# EAGLE board Copy of KeyVelocitysch (EAGLE 4.13), part 1 of 2
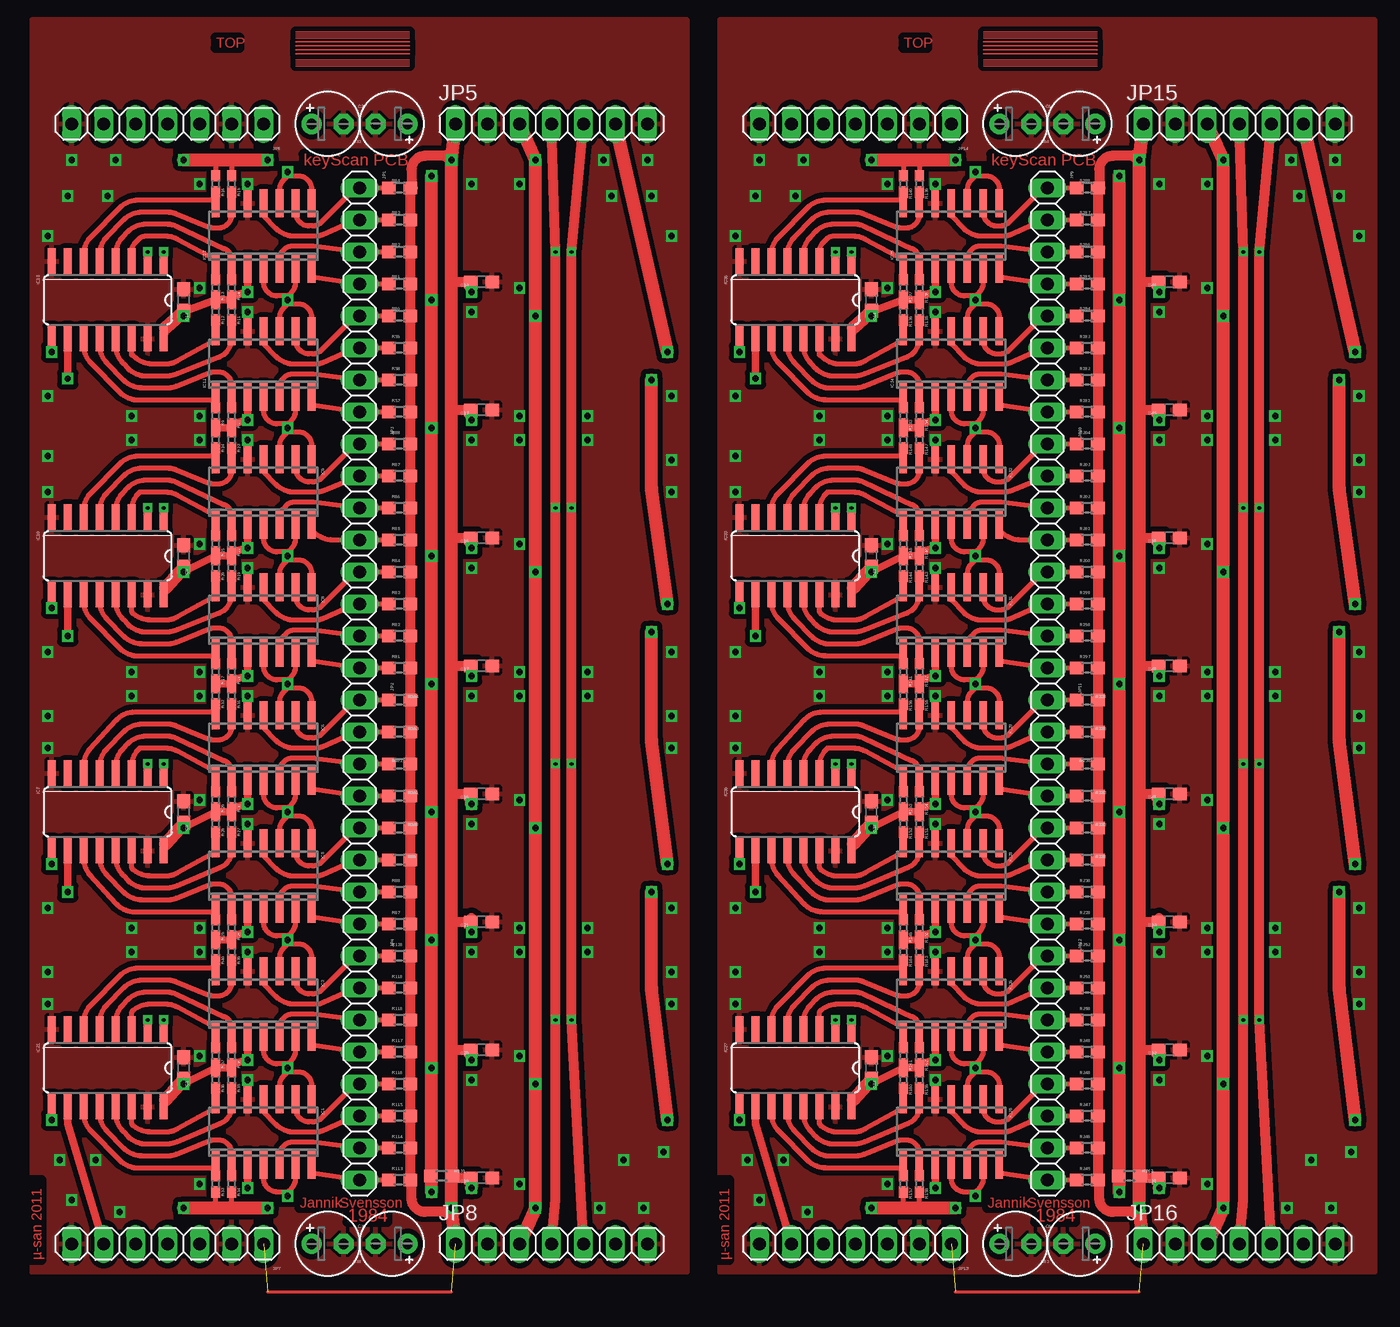
[diagram p0: board, top side]
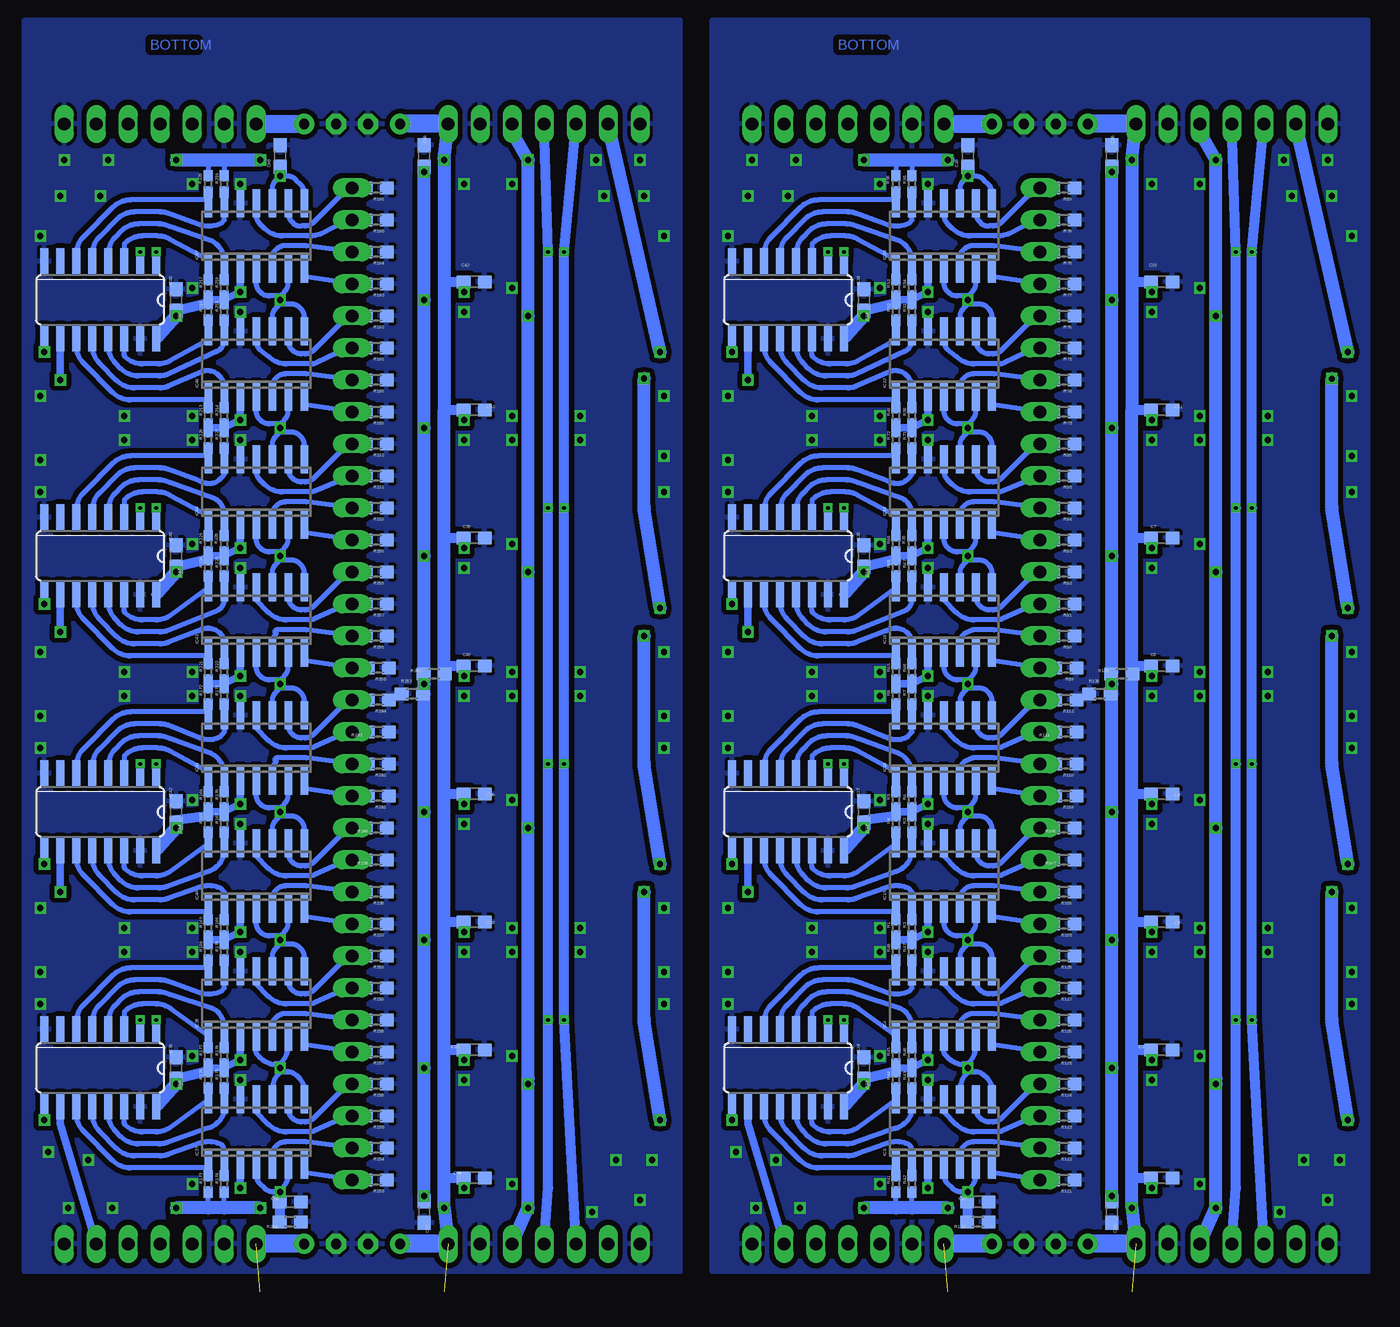
[diagram p1: board, bottom side, seen from below]

No outline drawn. Coordinates in mm, seen from the top.
Copper layers (1*16): Top 0.035mm / dielectric 1.5mm / Bottom 0.035mm
Design rules "default": minimum track width 10mil, minimum drill 24mil, track to track 8mil, track to pad 8mil, pad to pad 8mil, via to via 8mil, smd to smd 8mil, copper to edge 40mil, drill to drill 8mil, minimum pad ring 10mil, minimum via ring 8mil, stop-mask expansion 4mil, vias tented up to drill 0mil, thermal gap 10mil

## Footprints (pad centres in the part's own frame; a part is rotated, then mirrored left to right if it is on the bottom)
C0603 = smd 1.1 x 1: 1 -0.85,0; 2 0.85,0
E2,5-5 = drill 0.813 pad 1.6 round: + -1.27,0 | drill 0.813 pad 1.6 octagon: - 1.27,0
SO14 = smd 0.6 x 2.2: 1 -3.81,-2.6; 2 -2.54,-2.6; 3 -1.27,-2.6; 4 0,-2.6; 5 1.27,-2.6; 6 2.54,-2.6; 7 3.81,-2.6; 8 3.81,2.6; 9 2.54,2.6; 10 1.27,2.6; 11 0,2.6; 12 -1.27,2.6; 13 -2.54,2.6; 14 -3.81,2.6
SO16 = smd 0.66 x 2.032: 1 -4.445,-3.073; 2 -3.175,-3.073; 3 -1.905,-3.073; 4 -0.635,-3.073; 5 0.635,-3.073; 6 1.905,-3.073; 7 3.175,-3.073; 8 4.445,-3.073; 9 4.445,3.073; 10 3.175,3.073; 11 1.905,3.073; 12 0.635,3.073; 13 -0.635,3.073; 14 -1.905,3.073; 15 -3.175,3.073; 16 -4.445,3.073
1X08 = drill 1.016 long: 1 -8.89,0; 2 -6.35,0; 3 -3.81,0; 4 -1.27,0; 5 1.27,0; 6 3.81,0; 7 6.35,0; 8 8.89,0
1X07 = drill 1.016 long: 1 -7.62,0; 2 -5.08,0; 3 -2.54,0; 4 0,0; 5 2.54,0; 6 5.08,0; 7 7.62,0
R0402 = smd 0.9 x 0.7: 1 -0.65,0; 2 0.65,0
R0603 = smd 1.1 x 1: 1 -0.85,0; 2 0.85,0

## Placement (x,y rotation side)
C1  0u1  [C0603]  12.38,16.51 90 top
C2  0u1  [C0603]  16.67,7.78 0 bottom
C3  0u1  [C0603]  16.67,17.94 0 bottom
C4  0u1  [C0603]  16.67,38.26 0 bottom
C5  0u1  [C0603]  16.67,28.1 0 bottom
C6  0u1  [C0603]  12.38,36.83 90 top
C7  0u1  [C0603]  16.67,58.58 0 bottom
C8  0u1  [C0603]  16.67,48.42 0 bottom
C9  0u1  [C0603]  12.38,57.15 90 top
C10  0u1  [C0603]  16.67,78.9 0 bottom
C11  0u1  [C0603]  16.67,68.74 0 bottom
C12  0u1  [C0603]  12.38,77.47 90 top
C13  0u1  [C0603]  36.04,68.74 0 top
C14  0u1  [C0603]  36.04,78.9 0 top
C15  0u1  [C0603]  40.32,57.15 90 bottom
C16  0u1  [C0603]  36.04,38.26 0 top
C17  0u1  [C0603]  36.04,48.42 0 top
C18  0u1  [C0603]  36.04,58.58 0 top
C19  0u1  [C0603]  36.04,7.78 0 top
C20  0u1  [C0603]  36.04,17.94 0 top
C21  0u1  [C0603]  36.04,28.1 0 top
C22  0u1  [C0603]  40.32,36.83 90 bottom
C23  0u1  [C0603]  40.32,16.51 90 bottom
C24  0u1  [C0603]  40.32,77.47 90 bottom
C25  0u1  [C0603]  20.64,5.08 270 bottom
C26  0u1  [C0603]  20.64,88.9 90 bottom
C27  0u1  [C0603]  31.27,5.87 0 bottom
C28  0u1  [C0603]  32.07,88.9 90 bottom
C29  [E2,5-5]  23.81,91.44 0 top
C30  [E2,5-5]  23.81,2.54 0 top
C31  [E2,5-5]  28.89,2.54 180 top
C32  [E2,5-5]  28.89,91.44 180 top
C33  0u1  [C0603]  66.99,16.51 90 top
C34  0u1  [C0603]  71.28,7.78 0 bottom
C35  0u1  [C0603]  71.28,17.94 0 bottom
C36  0u1  [C0603]  71.28,38.26 0 bottom
C37  0u1  [C0603]  71.28,28.1 0 bottom
C38  0u1  [C0603]  66.99,36.83 90 top
C39  0u1  [C0603]  71.28,58.58 0 bottom
C40  0u1  [C0603]  71.28,48.42 0 bottom
C41  0u1  [C0603]  66.99,57.15 90 top
C42  0u1  [C0603]  71.28,78.9 0 bottom
C43  0u1  [C0603]  71.28,68.74 0 bottom
C44  0u1  [C0603]  66.99,77.47 90 top
C45  0u1  [C0603]  90.65,68.74 0 top
C46  0u1  [C0603]  90.65,78.9 0 top
C47  0u1  [C0603]  94.93,57.15 90 bottom
C48  0u1  [C0603]  90.65,38.26 0 top
C49  0u1  [C0603]  90.65,48.42 0 top
C50  0u1  [C0603]  90.65,58.58 0 top
C51  0u1  [C0603]  90.65,7.78 0 top
C52  0u1  [C0603]  90.65,17.94 0 top
C53  0u1  [C0603]  90.65,28.1 0 top
C54  0u1  [C0603]  94.93,36.83 90 bottom
C55  0u1  [C0603]  94.93,16.51 90 bottom
C56  0u1  [C0603]  94.93,77.47 90 bottom
C57  0u1  [C0603]  75.25,5.08 270 bottom
C58  0u1  [C0603]  75.25,88.9 90 bottom
C59  0u1  [C0603]  85.88,5.87 0 bottom
C60  0u1  [C0603]  86.68,88.9 90 bottom
C61  [E2,5-5]  78.42,91.44 0 top
C62  [E2,5-5]  78.42,2.54 0 top
C63  [E2,5-5]  83.5,2.54 180 top
C64  [E2,5-5]  83.5,91.44 180 top
IC1  LM339D  [SO14]  18.73,11.43 0 top
IC2  LM339D  [SO14]  18.73,21.59 0 top
IC3  LM339D  [SO14]  33.97,11.43 0 bottom
IC4  LM339D  [SO14]  33.97,21.59 0 bottom
IC5  LM339D  [SO14]  18.73,31.75 0 top
IC6  LM339D  [SO14]  18.73,41.91 0 top
IC7  74HC165D  [SO16]  6.35,36.83 180 top
IC8  LM339D  [SO14]  18.73,52.07 0 top
IC9  LM339D  [SO14]  18.73,62.23 0 top
IC10  74HC165D  [SO16]  6.35,57.15 180 top
IC11  LM339D  [SO14]  18.73,72.39 0 top
IC12  LM339D  [SO14]  18.73,82.55 0 top
IC13  74HC165D  [SO16]  6.35,77.47 180 top
IC14  74HC165D  [SO16]  46.35,16.51 180 bottom
IC15  LM339D  [SO14]  33.97,31.75 0 bottom
IC16  LM339D  [SO14]  33.97,41.91 0 bottom
IC17  74HC165D  [SO16]  46.35,36.83 180 bottom
IC18  LM339D  [SO14]  33.97,52.07 0 bottom
IC19  LM339D  [SO14]  33.97,62.23 0 bottom
IC20  74HC165D  [SO16]  46.35,57.15 180 bottom
IC21  74HC165D  [SO16]  6.35,16.51 180 top
IC22  LM339D  [SO14]  33.97,72.39 0 bottom
IC23  LM339D  [SO14]  33.97,82.55 0 bottom
IC24  74HC165D  [SO16]  46.35,77.47 180 bottom
IC25  LM339D  [SO14]  73.34,11.43 0 top
IC26  LM339D  [SO14]  73.34,21.59 0 top
IC27  74HC165D  [SO16]  60.96,16.51 180 top
IC28  LM339D  [SO14]  73.34,31.75 0 top
IC29  LM339D  [SO14]  73.34,41.91 0 top
IC30  74HC165D  [SO16]  60.96,36.83 180 top
IC31  LM339D  [SO14]  73.34,52.07 0 top
IC32  LM339D  [SO14]  73.34,62.23 0 top
IC33  74HC165D  [SO16]  60.96,57.15 180 top
IC34  LM339D  [SO14]  73.34,72.39 0 top
IC35  LM339D  [SO14]  73.34,82.55 0 top
IC36  74HC165D  [SO16]  60.96,77.47 180 top
IC37  LM339D  [SO14]  88.58,11.43 0 bottom
IC38  LM339D  [SO14]  88.58,21.59 0 bottom
IC39  74HC165D  [SO16]  100.96,16.51 180 bottom
IC40  LM339D  [SO14]  88.58,31.75 0 bottom
IC41  LM339D  [SO14]  88.58,41.91 0 bottom
IC42  74HC165D  [SO16]  100.96,36.83 180 bottom
IC43  LM339D  [SO14]  88.58,52.07 0 bottom
IC44  LM339D  [SO14]  88.58,62.23 0 bottom
IC45  74HC165D  [SO16]  100.96,57.15 180 bottom
IC46  LM339D  [SO14]  88.58,72.39 0 bottom
IC47  LM339D  [SO14]  88.58,82.55 0 bottom
IC48  74HC165D  [SO16]  100.96,77.47 180 bottom
JP1  [1X08]  26.35,77.47 270 top
JP2  [1X08]  26.35,36.83 270 top
JP3  [1X08]  26.35,57.15 270 top
JP4  [1X08]  26.35,16.51 270 top
JP5  [1X07]  41.59,91.44 0 top
JP6  [1X07]  11.11,91.44 180 top
JP7  [1X07]  11.11,2.54 180 top
JP8  [1X07]  41.59,2.54 0 top
JP9  [1X08]  80.96,77.47 270 top
JP10  [1X08]  80.96,57.15 270 top
JP11  [1X08]  80.96,36.83 270 top
JP12  [1X08]  80.96,16.51 270 top
JP13  [1X07]  65.72,2.54 180 top
JP14  [1X07]  65.72,91.44 180 top
JP15  [1X07]  96.2,91.44 0 top
JP16  [1X07]  96.2,2.54 0 top
R1  [R0402]  37.78,27.62 270 bottom
R2  [R0402]  36.51,27.62 270 bottom
R3  [R0402]  36.51,35.88 90 bottom
R4  [R0402]  37.78,35.88 90 bottom
R5  [R0402]  37.78,37.78 270 bottom
R6  [R0402]  36.51,37.78 270 bottom
R7  [R0402]  36.51,46.04 90 bottom
R8  [R0402]  37.78,46.04 90 bottom
R9  [R0402]  14.92,68.26 270 top
R10  [R0402]  16.19,68.26 270 top
R11  [R0402]  16.19,76.52 90 top
R12  [R0402]  14.92,76.52 90 top
R13  [R0402]  14.92,78.42 270 top
R14  [R0402]  16.19,78.42 270 top
R15  [R0402]  16.19,86.68 90 top
R16  [R0402]  14.92,86.68 90 top
R17  [R0402]  14.92,47.94 270 top
R18  [R0402]  16.19,47.94 270 top
R19  [R0402]  16.19,56.2 90 top
R20  [R0402]  14.92,56.2 90 top
R21  [R0402]  14.92,58.1 270 top
R22  [R0402]  16.19,58.1 270 top
R23  [R0402]  16.19,66.36 90 top
R24  [R0402]  14.92,66.36 90 top
R25  [R0402]  14.92,27.62 270 top
R26  [R0402]  16.19,27.62 270 top
R27  [R0402]  16.19,35.88 90 top
R28  [R0402]  14.92,35.88 90 top
R29  [R0402]  14.92,37.78 270 top
R30  [R0402]  16.19,37.78 270 top
R31  [R0402]  16.19,46.04 90 top
R32  [R0402]  14.92,46.04 90 top
R33  [R0402]  14.92,7.3 270 top
R34  [R0402]  16.19,7.3 270 top
R35  [R0402]  16.19,15.56 90 top
R36  [R0402]  14.92,15.56 90 top
R37  [R0402]  14.92,17.46 270 top
R38  [R0402]  16.19,17.46 270 top
R39  [R0402]  16.19,25.72 90 top
R40  [R0402]  14.92,25.72 90 top
R41  [R0402]  37.78,7.3 270 bottom
R42  [R0402]  36.51,7.3 270 bottom
R43  [R0402]  36.51,15.56 90 bottom
R44  [R0402]  37.78,15.56 90 bottom
R45  [R0402]  37.78,17.46 270 bottom
R46  [R0402]  36.51,17.46 270 bottom
R47  [R0402]  36.51,25.72 90 bottom
R48  [R0402]  37.78,25.72 90 bottom
R49  [R0402]  37.78,68.26 270 bottom
R50  [R0402]  36.51,68.26 270 bottom
R51  [R0402]  36.51,76.52 90 bottom
R52  [R0402]  37.78,76.52 90 bottom
R53  [R0402]  37.78,78.42 270 bottom
R54  [R0402]  36.51,78.42 270 bottom
R55  [R0402]  36.51,86.68 90 bottom
R56  [R0402]  37.78,86.68 90 bottom
R57  [R0603]  29.53,68.58 0 top
R58  [R0603]  29.53,71.12 0 top
R59  [R0603]  29.53,73.66 0 top
R60  [R0603]  29.53,76.2 0 top
R61  [R0603]  29.53,78.74 0 top
R62  [R0603]  29.53,81.28 0 top
R63  [R0603]  29.53,83.82 0 top
R64  [R0603]  29.53,86.36 0 top
R65  [R0402]  37.78,47.94 270 bottom
R66  [R0402]  36.51,47.94 270 bottom
R67  [R0402]  36.51,56.2 90 bottom
R68  [R0402]  37.78,56.2 90 bottom
R69  [R0402]  37.78,58.1 270 bottom
R70  [R0402]  36.51,58.1 270 bottom
R71  [R0402]  36.51,66.36 90 bottom
R72  [R0402]  37.78,66.36 90 bottom
R73  [R0603]  24.45,68.58 180 bottom
R74  [R0603]  24.45,71.12 180 bottom
R75  [R0603]  24.45,73.66 180 bottom
R76  [R0603]  24.45,76.2 180 bottom
R77  [R0603]  24.45,78.74 180 bottom
R78  [R0603]  24.45,81.28 180 bottom
R79  [R0603]  24.45,83.82 180 bottom
R80  [R0603]  24.45,86.36 180 bottom
R81  [R0603]  29.53,48.26 0 top
R82  [R0603]  29.53,50.8 0 top
R83  [R0603]  29.53,53.34 0 top
R84  [R0603]  29.53,55.88 0 top
R85  [R0603]  29.53,58.42 0 top
R86  [R0603]  29.53,60.96 0 top
R87  [R0603]  29.53,63.5 0 top
R88  [R0603]  29.53,66.04 0 top
R89  [R0603]  24.29,48.26 180 bottom
R90  [R0603]  24.45,50.8 180 bottom
R91  [R0603]  24.45,53.34 180 bottom
R92  [R0603]  24.45,55.88 180 bottom
R93  [R0603]  24.45,58.42 180 bottom
R94  [R0603]  24.45,60.96 180 bottom
R95  [R0603]  24.45,63.5 180 bottom
R96  [R0603]  24.45,66.04 180 bottom
R97  [R0603]  29.53,27.94 0 top
R98  [R0603]  29.53,30.48 0 top
R99  [R0603]  29.53,33.02 0 top
R100  [R0603]  29.53,35.56 0 top
R101  [R0603]  29.53,38.1 0 top
R102  [R0603]  29.53,40.64 0 top
R103  [R0603]  29.53,43.18 0 top
R104  [R0603]  29.53,45.72 0 top
R105  [R0603]  24.45,27.94 180 bottom
R106  [R0603]  24.45,30.48 180 bottom
R107  [R0603]  24.45,33.02 180 bottom
R108  [R0603]  24.45,35.56 180 bottom
R109  [R0603]  24.29,38.1 180 bottom
R110  [R0603]  24.29,40.64 180 bottom
R111  [R0603]  24.29,43.18 180 bottom
R112  [R0603]  24.29,45.72 180 bottom
R113  [R0603]  29.53,7.62 0 top
R114  [R0603]  29.53,10.16 0 top
R115  [R0603]  29.53,12.7 0 top
R116  [R0603]  29.53,15.24 0 top
R117  [R0603]  29.53,17.78 0 top
R118  [R0603]  29.53,20.32 0 top
R119  [R0603]  29.53,22.86 0 top
R120  [R0603]  29.53,25.4 0 top
R121  [R0603]  24.45,7.62 180 bottom
R122  [R0603]  24.45,10.16 180 bottom
R123  [R0603]  24.45,12.7 180 bottom
R124  [R0603]  24.45,15.24 180 bottom
R125  [R0603]  24.45,17.78 180 bottom
R126  [R0603]  24.45,20.32 180 bottom
R127  [R0603]  24.45,22.86 180 bottom
R128  [R0603]  24.45,25.4 180 bottom
R129  4k7  [R0603]  19.84,47.78 0 bottom
R130  1k  [R0603]  21.59,46.2 0 bottom
R131  1k  [R0603]  32.86,7.94 0 top
R132  4k7  [R0603]  31.27,4.29 180 bottom
R133  [R0402]  69.53,68.26 270 top
R134  [R0402]  70.8,68.26 270 top
R135  [R0402]  70.8,76.52 90 top
R136  [R0402]  69.53,76.52 90 top
R137  [R0402]  69.53,78.42 270 top
R138  [R0402]  70.8,78.42 270 top
R139  [R0402]  70.8,86.68 90 top
R140  [R0402]  69.53,86.68 90 top
R141  [R0402]  69.53,47.94 270 top
R142  [R0402]  70.8,47.94 270 top
R143  [R0402]  70.8,56.2 90 top
R144  [R0402]  69.53,56.2 90 top
R145  [R0402]  69.53,58.1 270 top
R146  [R0402]  70.8,58.1 270 top
R147  [R0402]  70.8,66.36 90 top
R148  [R0402]  69.53,66.36 90 top
R149  [R0402]  69.53,27.62 270 top
R150  [R0402]  70.8,27.62 270 top
R151  [R0402]  70.8,35.88 90 top
R152  [R0402]  69.53,35.88 90 top
R153  [R0402]  69.53,37.78 270 top
R154  [R0402]  70.8,37.78 270 top
R155  [R0402]  70.8,46.04 90 top
R156  [R0402]  69.53,46.04 90 top
R157  [R0402]  69.53,7.3 270 top
R158  [R0402]  70.8,7.3 270 top
R159  [R0402]  70.8,15.56 90 top
R160  [R0402]  69.53,15.56 90 top
R161  [R0402]  69.53,17.46 270 top
R162  [R0402]  70.8,17.46 270 top
R163  [R0402]  70.8,25.72 90 top
R164  [R0402]  69.53,25.72 90 top
R165  [R0402]  92.39,27.62 270 bottom
R166  [R0402]  91.12,27.62 270 bottom
R167  [R0402]  91.12,35.88 90 bottom
R168  [R0402]  92.39,35.88 90 bottom
R169  [R0402]  92.39,37.78 270 bottom
R170  [R0402]  91.12,37.78 270 bottom
R171  [R0402]  91.12,46.04 90 bottom
R172  [R0402]  92.39,46.04 90 bottom
R173  [R0402]  92.39,7.3 270 bottom
R174  [R0402]  91.12,7.3 270 bottom
R175  [R0402]  91.12,15.56 90 bottom
R176  [R0402]  92.39,15.56 90 bottom
R177  [R0402]  92.39,17.46 270 bottom
R178  [R0402]  91.12,17.46 270 bottom
R179  [R0402]  91.12,25.72 90 bottom
R180  [R0402]  92.39,25.72 90 bottom
R181  [R0603]  84.14,68.58 0 top
R182  [R0603]  84.14,71.12 0 top
R183  [R0603]  84.14,73.66 0 top
R184  [R0603]  84.14,76.2 0 top
R185  [R0603]  84.14,78.74 0 top
R186  [R0603]  84.14,81.28 0 top
R187  [R0603]  84.14,83.82 0 top
R188  [R0603]  84.14,86.36 0 top
R189  [R0603]  79.06,68.58 180 bottom
R190  [R0603]  79.06,71.12 180 bottom
R191  [R0603]  79.06,73.66 180 bottom
R192  [R0603]  79.06,76.2 180 bottom
R193  [R0603]  79.06,78.74 180 bottom
R194  [R0603]  79.06,81.28 180 bottom
R195  [R0603]  79.06,83.82 180 bottom
R196  [R0603]  79.06,86.36 180 bottom
R197  [R0603]  84.14,48.26 0 top
R198  [R0603]  84.14,50.8 0 top
R199  [R0603]  84.14,53.34 0 top
R200  [R0603]  84.14,55.88 0 top
R201  [R0603]  84.14,58.42 0 top
R202  [R0603]  84.14,60.96 0 top
R203  [R0603]  84.14,63.5 0 top
R204  [R0603]  84.14,66.04 0 top
R205  [R0603]  78.9,48.26 180 bottom
R206  [R0603]  79.06,50.8 180 bottom
R207  [R0603]  79.06,53.34 180 bottom
R208  [R0603]  79.06,55.88 180 bottom
R209  [R0603]  79.06,58.42 180 bottom
R210  [R0603]  79.06,60.96 180 bottom
R211  [R0603]  79.06,63.5 180 bottom
R212  [R0603]  79.06,66.04 180 bottom
R213  [R0402]  92.39,68.26 270 bottom
R214  [R0402]  91.12,68.26 270 bottom
R215  [R0402]  91.12,76.52 90 bottom
R216  [R0402]  92.39,76.52 90 bottom
R217  [R0402]  92.39,78.42 270 bottom
R218  [R0402]  91.12,78.42 270 bottom
R219  [R0402]  91.12,86.68 90 bottom
R220  [R0402]  92.39,86.68 90 bottom
R221  [R0402]  92.39,47.94 270 bottom
R222  [R0402]  91.12,47.94 270 bottom
R223  [R0402]  91.12,56.2 90 bottom
R224  [R0402]  92.39,56.2 90 bottom
R225  [R0402]  92.39,58.1 270 bottom
R226  [R0402]  91.12,58.1 270 bottom
R227  [R0402]  91.12,66.36 90 bottom
R228  [R0402]  92.39,66.36 90 bottom
R229  [R0603]  84.14,27.94 0 top
R230  [R0603]  84.14,30.48 0 top
R231  [R0603]  84.14,33.02 0 top
R232  [R0603]  84.14,35.56 0 top
R233  [R0603]  84.14,38.1 0 top
R234  [R0603]  84.14,40.64 0 top
R235  [R0603]  84.14,43.18 0 top
R236  [R0603]  84.14,45.72 0 top
R237  [R0603]  79.06,27.94 180 bottom
R238  [R0603]  79.06,30.48 180 bottom
R239  [R0603]  79.06,33.02 180 bottom
R240  [R0603]  79.06,35.56 180 bottom
R241  [R0603]  78.9,38.1 180 bottom
R242  [R0603]  78.9,40.64 180 bottom
R243  [R0603]  78.9,43.18 180 bottom
R244  [R0603]  78.9,45.72 180 bottom
R245  [R0603]  84.14,7.62 0 top
R246  [R0603]  84.14,10.16 0 top
R247  [R0603]  84.14,12.7 0 top
R248  [R0603]  84.14,15.24 0 top
R249  [R0603]  84.14,17.78 0 top
R250  [R0603]  84.14,20.32 0 top
R251  [R0603]  84.14,22.86 0 top
R252  [R0603]  84.14,25.4 0 top
R253  [R0603]  79.06,7.62 180 bottom
R254  [R0603]  79.06,10.16 180 bottom
R255  [R0603]  79.06,12.7 180 bottom
R256  [R0603]  79.06,15.24 180 bottom
R257  [R0603]  79.06,17.78 180 bottom
R258  [R0603]  79.06,20.32 180 bottom
R259  [R0603]  79.06,22.86 180 bottom
R260  [R0603]  79.06,25.4 180 bottom
R261  4k7  [R0603]  74.45,47.78 0 bottom
R262  1k  [R0603]  76.2,46.2 0 bottom
R263  1k  [R0603]  87.47,7.94 0 top
R264  4k7  [R0603]  85.88,4.29 180 bottom

## Library data of the parts
C1-C64 R1-R264 = rcl
IC1-IC6 IC8 IC9 IC11 IC12 IC15 IC16 IC18 IC19 IC22 IC23 IC25 IC26 IC28 IC29 IC31 IC32 IC34 IC35 IC37 IC38 IC40 IC41 IC43 IC44 IC46 IC47 = linear
IC7 IC10 IC13 IC14 IC17 IC20 IC21 IC24 IC27 IC30 IC33 IC36 IC39 IC42 IC45 IC48 = 74xx-eu
JP1-JP16 = pinhead

## Nets
+5V: C1.1 C2.1 C3.1 C4.1 C5.1 C6.1 C7.1 C8.1 C9.1 C10.1 C11.1 C12.1 C13.1 C14.1 C15.1 C16.1 C17.1 C18.1 C19.1 C20.1 C21.1 C22.1 C23.1 C24.1 C29.+ C30.+ C31.+ C32.+ IC1.3 IC2.3 IC3.3 IC4.3 IC5.3 IC6.3 IC7.16 IC8.3 IC9.3 IC10.16 IC11.3 IC12.3 IC13.16 IC14.16 IC15.3 IC16.3 IC17.16 IC18.3 IC19.3 IC20.16 IC21.16 IC22.3 IC23.3 IC24.16 JP5.1 JP5.3 JP6.1 JP6.3 JP7.1 JP7.3 JP8.1 JP8.3 R1.2 R2.2 R3.2 R4.2 R5.2 R6.2 R7.2 R8.2 R9.2 R10.2 R11.2 R12.2 R13.2 R14.2 R15.2 R16.2 R17.2 R18.2 R19.2 R20.2 R21.2 R22.2 R23.2 R24.2 R25.2 R26.2 R27.2 R28.2 R29.2 R30.2 R31.2 R32.2 R33.2 R34.2 R35.2 R36.2 R37.2 R38.2 R39.2 R40.2 R41.2 R42.2 R43.2 R44.2 R45.2 R46.2 R47.2 R48.2 R49.2 R50.2 R51.2 R52.2 R53.2 R54.2 R55.2 R56.2 R57.2 R58.2 R59.2 R60.2 R61.2 R62.2 R63.2 R64.2 R65.2 R66.2 R67.2 R68.2 R69.2 R70.2 R71.2 R72.2 R81.2 R82.2 R83.2 R84.2 R85.2 R86.2 R87.2 R88.2 R97.2 R98.2 R99.2 R100.2 R101.2 R102.2 R103.2 R104.2 R113.2 R114.2 R115.2 R116.2 R117.2 R118.2 R119.2 R120.2 R129.2 R131.2
+5V1: C33.1 C34.1 C35.1 C36.1 C37.1 C38.1 C39.1 C40.1 C41.1 C42.1 C43.1 C44.1 C45.1 C46.1 C47.1 C48.1 C49.1 C50.1 C51.1 C52.1 C53.1 C54.1 C55.1 C56.1 C61.+ C62.+ C63.+ C64.+ IC25.3 IC26.3 IC27.16 IC28.3 IC29.3 IC30.16 IC31.3 IC32.3 IC33.16 IC34.3 IC35.3 IC36.16 IC37.3 IC38.3 IC39.16 IC40.3 IC41.3 IC42.16 IC43.3 IC44.3 IC45.16 IC46.3 IC47.3 IC48.16 JP13.1 JP13.3 JP14.1 JP14.3 JP15.1 JP15.3 JP16.1 JP16.3 R133.2 R134.2 R135.2 R136.2 R137.2 R138.2 R139.2 R140.2 R141.2 R142.2 R143.2 R144.2 R145.2 R146.2 R147.2 R148.2 R149.2 R150.2 R151.2 R152.2 R153.2 R154.2 R155.2 R156.2 R157.2 R158.2 R159.2 R160.2 R161.2 R162.2 R163.2 R164.2 R165.2 R166.2 R167.2 R168.2 R169.2 R170.2 R171.2 R172.2 R173.2 R174.2 R175.2 R176.2 R177.2 R178.2 R179.2 R180.2 R181.2 R182.2 R183.2 R184.2 R185.2 R186.2 R187.2 R188.2 R197.2 R198.2 R199.2 R200.2 R201.2 R202.2 R203.2 R204.2 R213.2 R214.2 R215.2 R216.2 R217.2 R218.2 R219.2 R220.2 R221.2 R222.2 R223.2 R224.2 R225.2 R226.2 R227.2 R228.2 R229.2 R230.2 R231.2 R232.2 R233.2 R234.2 R235.2 R236.2 R245.2 R246.2 R247.2 R248.2 R249.2 R250.2 R251.2 R252.2 R261.2 R263.2
CLK_A: IC7.2 IC10.2 IC13.2 IC21.2 JP6.5 JP7.5
CLK_A1: IC27.2 IC30.2 IC33.2 IC36.2 JP13.5 JP14.5
CLK_B: IC14.2 IC17.2 IC20.2 IC24.2 JP5.5 JP8.5
CLK_B1: IC39.2 IC42.2 IC45.2 IC48.2 JP15.5 JP16.5
DA1: IC12.14 IC13.6 R16.1
DA2: IC35.14 IC36.6 R140.1
DA3: IC34.1 IC36.11 R133.1
DA4: IC32.14 IC33.6 R148.1
DA5: IC31.1 IC33.11 R141.1
DA6: IC29.14 IC30.6 R156.1
DA7: IC28.1 IC30.11 R149.1
DA8: IC11.1 IC13.11 R9.1
DA9: IC9.14 IC10.6 R24.1
DA10: IC26.14 IC27.6 R164.1
DA11: IC25.1 IC27.11 R157.1
DA16: IC8.1 IC10.11 R17.1
DA17: IC6.14 IC7.6 R32.1
DA24: IC5.1 IC7.11 R25.1
DA25: IC2.14 IC21.6 R40.1
DA32: IC1.1 IC21.11 R33.1
DB1: IC23.14 IC24.6 R56.1
DB2: IC47.14 IC48.6 R220.1
DB3: IC46.1 IC48.11 R213.1
DB4: IC44.14 IC45.6 R228.1
DB5: IC43.1 IC45.11 R221.1
DB6: IC41.14 IC42.6 R172.1
DB7: IC40.1 IC42.11 R165.1
DB8: IC22.1 IC24.11 R49.1
DB9: IC19.14 IC20.6 R72.1
DB10: IC38.14 IC39.6 R180.1
DB11: IC37.1 IC39.11 R173.1
DB16: IC18.1 IC20.11 R65.1
DB17: IC16.14 IC17.6 R8.1
DB24: IC15.1 IC17.11 R1.1
DB25: IC4.14 IC14.6 R48.1
DB32: IC3.1 IC14.11 R41.1
GND: C1.2 C2.2 C3.2 C4.2 C5.2 C6.2 C7.2 C8.2 C9.2 C10.2 C11.2 C12.2 C13.2 C14.2 C15.2 C16.2 C17.2 C18.2 C19.2 C20.2 C21.2 C22.2 C23.2 C24.2 C25.2 C26.2 C27.2 C28.2 C29.- C30.- C31.- C32.- IC1.12 IC2.12 IC3.12 IC4.12 IC5.12 IC6.12 IC7.8 IC7.15 IC8.12 IC9.12 IC10.8 IC10.15 IC11.12 IC12.12 IC13.8 IC13.15 IC14.8 IC14.15 IC15.12 IC16.12 IC17.8 IC17.15 IC18.12 IC19.12 IC20.8 IC20.15 IC21.8 IC21.15 IC22.12 IC23.12 IC24.8 IC24.15 JP5.2 JP5.7 JP6.2 JP6.7 JP7.2 JP7.7 JP8.2 JP8.7 R73.1 R74.1 R75.1 R76.1 R77.1 R78.1 R79.1 R80.1 R89.1 R90.1 R91.1 R92.1 R93.1 R94.1 R95.1 R96.1 R105.1 R106.1 R107.1 R108.1 R109.1 R110.1 R111.1 R112.1 R121.1 R122.1 R123.1 R124.1 R125.1 R126.1 R127.1 R128.1 R130.1 R132.1
GND1: C33.2 C34.2 C35.2 C36.2 C37.2 C38.2 C39.2 C40.2 C41.2 C42.2 C43.2 C44.2 C45.2 C46.2 C47.2 C48.2 C49.2 C50.2 C51.2 C52.2 C53.2 C54.2 C55.2 C56.2 C57.2 C58.2 C59.2 C60.2 C61.- C62.- C63.- C64.- IC25.12 IC26.12 IC27.8 IC27.15 IC28.12 IC29.12 IC30.8 IC30.15 IC31.12 IC32.12 IC33.8 IC33.15 IC34.12 IC35.12 IC36.8 IC36.15 IC37.12 IC38.12 IC39.8 IC39.15 IC40.12 IC41.12 IC42.8 IC42.15 IC43.12 IC44.12 IC45.8 IC45.15 IC46.12 IC47.12 IC48.8 IC48.15 JP13.2 JP13.7 JP14.2 JP14.7 JP15.2 JP15.7 JP16.2 JP16.7 R189.1 R190.1 R191.1 R192.1 R193.1 R194.1 R195.1 R196.1 R205.1 R206.1 R207.1 R208.1 R209.1 R210.1 R211.1 R212.1 R237.1 R238.1 R239.1 R240.1 R241.1 R242.1 R243.1 R244.1 R253.1 R254.1 R255.1 R256.1 R257.1 R258.1 R259.1 R260.1 R262.1 R264.1
KI1: IC12.9 IC23.9 JP1.1 R64.1 R80.2
KI2: IC12.11 IC23.11 JP1.2 R63.1 R79.2
KI3: IC12.5 IC23.5 JP1.3 R62.1 R78.2
KI4: IC12.7 IC23.7 JP1.4 R61.1 R77.2
KI5: IC11.9 IC22.9 JP1.5 R60.1 R76.2
KI6: IC11.11 IC22.11 JP1.6 R59.1 R75.2
KI7: IC11.5 IC22.5 JP1.7 R58.1 R74.2
KI8: IC11.7 IC22.7 JP1.8 R57.1 R73.2
KI9: IC9.9 IC19.9 JP3.1 R88.1 R96.2
KI10: IC9.11 IC19.11 JP3.2 R87.1 R95.2
KI11: IC9.5 IC19.5 JP3.3 R86.1 R94.2
KI12: IC9.7 IC19.7 JP3.4 R85.1 R93.2
KI13: IC8.9 IC18.9 JP3.5 R84.1 R92.2
KI14: IC8.11 IC18.11 JP3.6 R83.1 R91.2
KI15: IC8.5 IC18.5 JP3.7 R82.1 R90.2
KI16: IC8.7 IC18.7 JP3.8 R81.1 R89.2
KI17: IC6.9 IC16.9 JP2.1 R104.1 R112.2
KI18: IC6.11 IC16.11 JP2.2 R103.1 R111.2
KI19: IC6.5 IC16.5 JP2.3 R102.1 R110.2
KI20: IC6.7 IC16.7 JP2.4 R101.1 R109.2
KI21: IC5.9 IC15.9 JP2.5 R100.1 R108.2
KI22: IC5.11 IC15.11 JP2.6 R99.1 R107.2
KI23: IC5.5 IC15.5 JP2.7 R98.1 R106.2
KI24: IC5.7 IC15.7 JP2.8 R97.1 R105.2
KI25: IC2.9 IC4.9 JP4.1 R120.1 R128.2
KI26: IC2.11 IC4.11 JP4.2 R119.1 R127.2
KI27: IC2.5 IC4.5 JP4.3 R118.1 R126.2
KI28: IC2.7 IC4.7 JP4.4 R117.1 R125.2
KI29: IC1.9 IC3.9 JP4.5 R116.1 R124.2
KI30: IC1.11 IC3.11 JP4.6 R115.1 R123.2
KI31: IC1.5 IC3.5 JP4.7 R114.1 R122.2
KI32: IC1.7 IC3.7 JP4.8 R113.1 R121.2
KI33: IC32.9 IC44.9 JP10.1 R204.1 R212.2
KI34: IC32.11 IC44.11 JP10.2 R203.1 R211.2
KI35: IC32.5 IC44.5 JP10.3 R202.1 R210.2
KI36: IC32.7 IC44.7 JP10.4 R201.1 R209.2
KI37: IC31.9 IC43.9 JP10.5 R200.1 R208.2
KI38: IC31.11 IC43.11 JP10.6 R199.1 R207.2
KI39: IC31.5 IC43.5 JP10.7 R198.1 R206.2
KI40: IC31.7 IC43.7 JP10.8 R197.1 R205.2
KI41: IC35.9 IC47.9 JP9.1 R188.1 R196.2
KI42: IC35.11 IC47.11 JP9.2 R187.1 R195.2
KI43: IC35.5 IC47.5 JP9.3 R186.1 R194.2
KI44: IC35.7 IC47.7 JP9.4 R185.1 R193.2
KI45: IC34.9 IC46.9 JP9.5 R184.1 R192.2
KI46: IC34.11 IC46.11 JP9.6 R183.1 R191.2
KI47: IC34.5 IC46.5 JP9.7 R182.1 R190.2
KI48: IC34.7 IC46.7 JP9.8 R181.1 R189.2
KI49: IC29.9 IC41.9 JP11.1 R236.1 R244.2
KI50: IC29.11 IC41.11 JP11.2 R235.1 R243.2
KI51: IC29.5 IC41.5 JP11.3 R234.1 R242.2
KI52: IC29.7 IC41.7 JP11.4 R233.1 R241.2
KI53: IC28.9 IC40.9 JP11.5 R232.1 R240.2
KI54: IC28.11 IC40.11 JP11.6 R231.1 R239.2
KI55: IC28.5 IC40.5 JP11.7 R230.1 R238.2
KI56: IC28.7 IC40.7 JP11.8 R229.1 R237.2
KI57: IC26.9 IC38.9 JP12.1 R252.1 R260.2
KI58: IC26.11 IC38.11 JP12.2 R251.1 R259.2
KI59: IC26.5 IC38.5 JP12.3 R250.1 R258.2
KI60: IC26.7 IC38.7 JP12.4 R249.1 R257.2
KI61: IC25.9 IC37.9 JP12.5 R248.1 R256.2
KI62: IC25.11 IC37.11 JP12.6 R247.1 R255.2
KI63: IC25.5 IC37.5 JP12.7 R246.1 R254.2
KI64: IC25.7 IC37.7 JP12.8 R245.1 R253.2
LATCH_A: IC7.1 IC10.1 IC13.1 IC21.1 JP6.4 JP7.4
LATCH_A1: IC27.1 IC30.1 IC33.1 IC36.1 JP13.4 JP14.4
LATCH_B: IC14.1 IC17.1 IC20.1 IC24.1 JP5.4 JP8.4
LATCH_B1: IC39.1 IC42.1 IC45.1 IC48.1 JP15.4 JP16.4
N$1: IC14.9 IC17.10
N$2: IC17.9 IC20.10
N$3: IC27.9 IC30.10
N$4: IC12.13 IC13.5 R15.1
N$5: IC20.9 IC24.10
N$6: IC24.9 JP5.6
N$9: IC12.2 IC13.4 R14.1
N$10: IC12.1 IC13.3 R13.1
N$11: IC11.14 IC13.14 R12.1
N$12: IC7.10 IC21.9
N$13: IC11.13 IC13.13 R11.1
N$14: IC11.2 IC13.12 R10.1
N$15: IC30.9 IC33.10
N$16: IC33.9 IC36.10
N$17: IC8.2 IC10.12 R18.1
N$18: IC8.13 IC10.13 R19.1
N$19: IC8.14 IC10.14 R20.1
N$20: IC9.1 IC10.3 R21.1
N$21: IC9.2 IC10.4 R22.1
N$22: IC7.9 IC10.10
N$23: IC9.13 IC10.5 R23.1
N$24: IC39.9 IC42.10
N$25: IC10.9 IC13.10
N$26: IC45.9 IC48.10
N$27: IC5.2 IC7.12 R26.1
N$28: IC5.13 IC7.13 R27.1
N$29: IC5.14 IC7.14 R28.1
N$30: IC6.1 IC7.3 R29.1
N$33: IC6.2 IC7.4 R30.1
N$34: IC13.9 JP6.6
N$35: IC6.13 IC7.5 R31.1
N$36: IC48.9 JP15.6
N$37: IC42.9 IC45.10
N$38: IC1.2 IC21.12 R34.1
N$39: IC1.13 IC21.13 R35.1
N$40: IC1.14 IC21.14 R36.1
N$41: IC2.1 IC21.3 R37.1
N$42: IC2.2 IC21.4 R38.1
N$43: IC2.13 IC21.5 R39.1
N$44: IC35.13 IC36.5 R139.1
N$45: IC35.2 IC36.4 R138.1
N$46: IC22.2 IC24.12 R50.1
N$47: IC22.13 IC24.13 R51.1
N$48: IC22.14 IC24.14 R52.1
N$49: IC23.1 IC24.3 R53.1
N$50: IC23.2 IC24.4 R54.1
N$51: IC23.13 IC24.5 R55.1
N$52: IC35.1 IC36.3 R137.1
N$53: IC34.14 IC36.14 R136.1
N$54: IC18.2 IC20.12 R66.1
N$55: IC18.13 IC20.13 R67.1
N$56: IC18.14 IC20.14 R68.1
N$57: IC19.1 IC20.3 R69.1
N$58: IC19.2 IC20.4 R70.1
N$59: IC19.13 IC20.5 R71.1
N$60: IC34.13 IC36.13 R135.1
N$61: IC34.2 IC36.12 R134.1
N$62: IC15.2 IC17.12 R2.1
N$63: IC15.13 IC17.13 R3.1
N$64: IC15.14 IC17.14 R4.1
N$65: IC16.1 IC17.3 R5.1
N$66: IC16.2 IC17.4 R6.1
N$67: IC16.13 IC17.5 R7.1
N$68: IC31.2 IC33.12 R142.1
N$69: IC31.13 IC33.13 R143.1
N$70: IC3.2 IC14.12 R42.1
N$71: IC3.13 IC14.13 R43.1
N$72: IC3.14 IC14.14 R44.1
N$73: IC4.1 IC14.3 R45.1
N$74: IC4.2 IC14.4 R46.1
N$75: IC4.13 IC14.5 R47.1
N$76: IC31.14 IC33.14 R144.1
N$85: IC32.1 IC33.3 R145.1
N$86: IC32.2 IC33.4 R146.1
N$87: IC32.13 IC33.5 R147.1
N$88: IC28.2 IC30.12 R150.1
N$89: IC28.13 IC30.13 R151.1
N$90: IC28.14 IC30.14 R152.1
N$91: IC29.1 IC30.3 R153.1
N$92: IC29.2 IC30.4 R154.1
N$93: IC29.13 IC30.5 R155.1
N$94: IC25.2 IC27.12 R158.1
N$95: IC25.13 IC27.13 R159.1
N$96: IC25.14 IC27.14 R160.1
N$97: IC26.1 IC27.3 R161.1
N$98: IC26.2 IC27.4 R162.1
N$99: IC26.13 IC27.5 R163.1
N$100: IC46.2 IC48.12 R214.1
N$101: IC46.13 IC48.13 R215.1
N$102: IC46.14 IC48.14 R216.1
N$103: IC47.1 IC48.3 R217.1
N$104: IC47.2 IC48.4 R218.1
N$105: IC47.13 IC48.5 R219.1
N$106: IC43.2 IC45.12 R222.1
N$107: IC43.13 IC45.13 R223.1
N$108: IC43.14 IC45.14 R224.1
N$109: IC44.1 IC45.3 R225.1
N$110: IC44.2 IC45.4 R226.1
N$111: IC44.13 IC45.5 R227.1
N$112: IC40.2 IC42.12 R166.1
N$113: IC40.13 IC42.13 R167.1
N$114: IC40.14 IC42.14 R168.1
N$115: IC41.1 IC42.3 R169.1
N$116: IC41.2 IC42.4 R170.1
N$117: IC41.13 IC42.5 R171.1
N$118: IC37.2 IC39.12 R174.1
N$119: IC37.13 IC39.13 R175.1
N$120: IC37.14 IC39.14 R176.1
N$121: IC38.1 IC39.3 R177.1
N$122: IC38.2 IC39.4 R178.1
N$123: IC38.13 IC39.5 R179.1
N$124: IC36.9 JP14.6
SDI_A: IC21.10 JP7.6
SDI_A1: IC27.10 JP13.6
SDI_B: IC14.10 JP8.6
SDI_B1: IC39.10 JP16.6
VREF_A_COMP: C25.1 C26.1 IC1.4 IC1.6 IC1.8 IC1.10 IC2.4 IC2.6 IC2.8 IC2.10 IC5.4 IC5.6 IC5.8 IC5.10 IC6.4 IC6.6 IC6.8 IC6.10 IC8.4 IC8.6 IC8.8 IC8.10 IC9.4 IC9.6 IC9.8 IC9.10 IC11.4 IC11.6 IC11.8 IC11.10 IC12.4 IC12.6 IC12.8 IC12.10 R129.1 R130.2
VREF_A_COMP1: C57.1 C58.1 IC25.4 IC25.6 IC25.8 IC25.10 IC26.4 IC26.6 IC26.8 IC26.10 IC28.4 IC28.6 IC28.8 IC28.10 IC29.4 IC29.6 IC29.8 IC29.10 IC31.4 IC31.6 IC31.8 IC31.10 IC32.4 IC32.6 IC32.8 IC32.10 IC34.4 IC34.6 IC34.8 IC34.10 IC35.4 IC35.6 IC35.8 IC35.10 R261.1 R262.2
VREF_B_COMP: C27.1 C28.1 IC3.4 IC3.6 IC3.8 IC3.10 IC4.4 IC4.6 IC4.8 IC4.10 IC15.4 IC15.6 IC15.8 IC15.10 IC16.4 IC16.6 IC16.8 IC16.10 IC18.4 IC18.6 IC18.8 IC18.10 IC19.4 IC19.6 IC19.8 IC19.10 IC22.4 IC22.6 IC22.8 IC22.10 IC23.4 IC23.6 IC23.8 IC23.10 R131.1 R132.2
VREF_B_COMP1: C59.1 C60.1 IC37.4 IC37.6 IC37.8 IC37.10 IC38.4 IC38.6 IC38.8 IC38.10 IC40.4 IC40.6 IC40.8 IC40.10 IC41.4 IC41.6 IC41.8 IC41.10 IC43.4 IC43.6 IC43.8 IC43.10 IC44.4 IC44.6 IC44.8 IC44.10 IC46.4 IC46.6 IC46.8 IC46.10 IC47.4 IC47.6 IC47.8 IC47.10 R263.1 R264.2

## Tracks (layer width: path | path; a pad name or v marks a point on that pad's centre or on a via)
+5V  (via drill 0.5)  (3 unrouted)
  Top 0.254: 19.05,-1.27 33.66,-1.27
  Top 0.406: IC13.16 10.79,73.98 10.69,74.4 | R29.2 14.92,37.15 | 14.92,36.83 R28.2 | 16.19,46.67 R31.2 16.19,46.99 R18.2 | 14.92,46.67 R32.2 R17.2 | 14.92,56.83 R20.2 14.92,57.15 | 16.19,66.99 R23.2 16.19,67.31 R10.2 | 14.92,66.99 R24.2 R9.2 | 16.19,56.83 R19.2 16.19,57.15 R22.2 | 16.19,77.15 R11.2 16.19,77.47 R14.2 | 14.92,77.15 R12.2 14.92,77.47 | 16.19,87.31 R15.2 16.19,88.58 | 16.19,36.51 R27.2 16.19,36.83 R30.2 | 14.92,26.99 R25.2 R40.2 | 16.18,26.66 16.19,26.99 R26.2 R39.2 | 16.19,16.19 R35.2 16.19,16.51 R38.2 | 14.92,16.19 R36.2 14.92,16.51 | 16.19,6.67 R34.2 16.19,5.4 | R114.2 30.48,10.16 30.38,10.06 | R115.2 30.16,12.7 30.38,12.48 | R116.2 30.48,15.24 30.38,15.14 | R117.2 30.48,17.78 30.38,17.68 | R118.2 30.48,20.32 30.38,20.22 | R119.2 30.48,22.86 30.38,22.76 | R120.2 30.16,25.4 30.38,25.18 | R97.2 30.48,27.94 30.38,27.84 | R98.2 30.48,30.48 30.38,30.38 | R99.2 30.48,33.02 30.38,32.92 | R100.2 30.48,35.56 30.38,35.46 | R101.2 30.48,38.1 30.38,38 | R102.2 30.48,40.64 30.38,40.54 | R103.2 30.48,43.18 30.38,43.08 | R104.2 30.48,45.72 30.38,45.62 | R81.2 30.48,48.26 30.38,48.16 | R82.2 30.48,50.8 30.38,50.7 | R83.2 30.48,53.34 30.38,53.24 | R84.2 30.48,55.88 30.38,55.78 | R85.2 30.48,58.42 30.38,58.32 | R86.2 30.48,60.96 30.38,60.86 | R87.2 30.48,63.5 30.38,63.4 | R88.2 30.48,66.04 30.38,65.94 | R57.2 30.48,68.58 30.38,68.48 | R58.2 30.48,71.12 30.38,71.02 | R59.2 30.48,73.66 30.38,73.56 | R60.2 30.48,76.2 30.38,76.1 | R61.2 30.48,78.74 30.38,78.64 | R62.2 30.48,81.28 30.38,81.18 | R63.2 30.48,83.82 30.38,83.72 | 30.48,86.36 30.38,86.26 | 14.92,88.58 R16.2 | 14.92,5.4 R33.2 | 35.24,78.9 35.24,78.42 | 12.38,36.04 C6.1 v12.38,35.56 | 33.66,7.94 R131.2
  Top 0.406: 35.24,68.26 v35.24,67.94 | 12.38,76.68 C12.1 v12.38,76.2 | 12.38,56.36 C9.1 v12.38,55.88 | 35.24,48.42 35.08,48.42 35.24,48.26 v35.24,47.62
  Top 0.61: IC2.3 v17.46,17.14 R38.2 | v17.46,6.99 IC1.3 | IC6.3 v17.46,37.47 R30.2 | IC5.3 v17.46,27.3 R26.2 | IC9.3 v17.46,57.78 R22.2 | IC8.3 v17.46,47.62 R18.2 | IC12.3 v17.46,78.11 R14.2 | IC11.3 v17.46,67.94 R10.2 | 10.95,75.25 IC13.16 | 14.92,36.83 16.19,36.83 | 14.92,36.83 R29.2 | 16.19,46.99 14.92,46.99 R17.2 | 14.92,57.15 16.19,57.15 | 14.92,57.15 R21.2 | 16.19,67.31 14.92,67.31 R9.2 | 14.92,77.47 16.19,77.47 | 14.92,77.47 R13.2 | 10.95,34.29 IC7.16 | IC21.16 10.95,13.97 | 10.95,54.61 IC10.16 | 16.18,26.66 14.92,26.67 R25.2 | 14.92,16.51 R37.2 | 14.92,16.51 16.19,16.51 | v12.38,35.56 14.92,36.83 | v12.38,15.24 14.92,16.51 | v12.38,55.88 14.92,57.15 | 12.38,76.52 14.92,77.47 | C17.1 v35.24,47.62
  Top 0.813: C12.1 12.38,76.52 | 30.38,10.06 R113.2 | 30.38,12.48 R114.2 | 30.38,15.14 R115.2 | 30.38,17.68 R116.2 | 30.38,20.22 R117.2 | 30.38,22.76 R118.2 | 30.38,25.18 R119.2 | 30.38,27.84 R120.2 | 30.38,30.38 R97.2 | 30.38,32.92 R98.2 | 30.38,35.46 R99.2 | 30.38,38 R100.2 | 30.38,40.54 R101.2 | 30.38,43.08 R102.2 | 30.38,45.62 R103.2 | 30.38,48.16 R104.2 | 30.38,50.7 R81.2 | 30.38,53.24 R82.2 | 30.38,55.78 R83.2 | 30.38,58.32 R84.2 | 30.38,60.86 R85.2 | 30.38,63.4 R86.2 | 30.38,65.94 R87.2 | 30.38,68.48 R88.2 | 30.38,71.02 R57.2 | 30.38,73.56 R58.2 | 30.38,76.1 R59.2 | 30.38,78.64 R60.2 | 30.38,81.18 R61.2 | 30.38,83.72 R62.2 | 30.38,86.26 R63.2 | 33.34,88.9 31.53,88.9 arc45 30.82,88.61 30.77,88.56 arc45 30.48,87.85 30.48,86.36 | 30.48,7.62 30.48,6.13 arc45 30.77,5.42 30.82,5.37 arc45 31.53,5.08 33.34,5.08 | 33.66,78.9 35.24,78.9 | 35.24,68.26 35.24,68.74 33.66,68.74 | 35.24,58.58 C18.1 | 35.24,58.58 v35.24,57.78 | 33.66,58.58 35.24,58.58 | 33.66,48.42 35.08,48.42 C17.1 35.24,48.42 | 33.66,38.26 35.24,38.26 | v35.24,27.3 35.24,28.42 C21.1 33.66,28.1 | 33.66,17.94 C20.1 35.24,17.94 | 33.66,7.78 C19.1 35.24,7.78
  Top 1.016: 12.38,76.52 10.95,75.25 | C6.1 12.38,35.88 10.95,34.29 | C1.1 12.38,15.56 10.95,13.97 | C9.1 12.38,56.2 10.95,54.61 | C18.1 35.24,58.1 | 35.24,68.26 C13.1 | 35.24,78.42 C14.1 | v35.24,37.47 35.24,37.78 C16.1 | C19.1 v35.24,6.99 | C20.1 35.24,17.46 | v33.66,88.58 33.66,78.9 33.66,68.74 33.66,58.58 33.66,48.42 33.66,38.26 33.66,28.1 33.66,17.94 33.66,7.94 33.66,7.78 v33.66,5.4 | v33.66,88.58 33.34,88.9 | 30.48,86.36 R64.2 | v33.66,5.4 33.34,5.08 | v19.05,88.58 16.19,88.58 14.92,88.58 v12.38,88.58 | v12.38,5.4 14.92,5.4 16.19,5.4 v19.05,5.4 | JP8.3 v40.32,5.4 v40.32,15.24 v40.32,35.56 v40.32,55.88 v40.32,76.2 v40.32,88.58 JP5.3 | JP8.1 v33.66,5.4 | v33.66,88.58 JP5.1
  Bottom 0.406: 41.91,13.34 42.01,13.44 | IC17.16 41.91,33.66 42.01,33.76 | IC20.16 41.75,54.29 42.13,54.08 | IC24.16 41.91,74.3 42.01,74.4 | R44.2 R45.2 37.78,16.83 37.77,16.5 | 36.51,16.19 R43.2 36.51,16.51 R46.2 | R2.2 36.51,26.67 R47.2 | 37.78,26.67 R48.2 | 36.51,36.51 R3.2 36.51,36.83 R6.2 | 36.51,46.67 R7.2 36.51,46.99 R66.2 | R65.2 37.78,46.99 R8.2 37.78,46.67 | R70.2 36.51,57.15 R67.2 | R50.2 36.51,67.31 R71.2 | R54.2 36.51,77.47 R51.2 | 37.78,87.31 37.77,87.33 37.77,88.25 37.78,88.58 | 36.51,6.67 R42.2 | 36.51,6.67 36.53,6.65 | v40.32,15.24 C23.1 | 40.32,36.2 C22.1 v40.32,35.56 | v40.32,55.88 C15.1 | v40.32,76.2 C24.1 | R68.2 37.78,57.15 R69.2 | R4.2 37.78,36.83 R5.2 | R48.2 37.78,26.35 | R48.2 R1.2 | 36.51,88.58 R55.2 | 36.51,5.4 36.51,6.67 | 37.78,5.4 R41.2 | R129.2 19.05,47.73 19.05,47.62 | 12.33,15.66 12.22,15.56 12.22,15.4 v12.38,15.24 | 12.38,15.18 12.33,15.66 | 12.33,15.66 12.38,15.72 | 12.38,15.72
  Bottom 0.61: 41.91,13.34 IC14.16 41.75,13.65 | 37.77,16.5 36.51,16.51 v35.24,17.14 IC4.3 | 36.51,26.67 37.78,26.67 | 37.78,36.83 36.51,36.83 v35.24,37.47 IC16.3 | 37.78,46.99 36.51,46.99 v35.24,47.62 IC18.3 | 37.78,57.15 36.51,57.15 v35.24,57.78 IC19.3 | 37.78,67.31 36.51,67.31 v35.24,67.94 IC22.3 | 37.78,77.47 36.51,77.47 v35.24,78.11 IC23.3 | R42.2 36.53,6.65 | 41.75,74.61 IC24.16 | 41.75,33.97 IC17.16 | v35.24,6.99 IC3.3 | 37.78,87.31 R56.2 | R52.2 37.78,77.47 | 37.78,77.47 R53.2 | 37.78,67.31 R72.2 | 37.78,67.31 R49.2 | R47.2 36.5,26.68 v35.24,27.3 IC15.3
  Bottom 0.813: C23.1 40.38,15.66 38.1,16.19 37.78,16.19 R44.2 | 40.32,36.2 37.94,36.51 37.78,36.51 R4.2 | C15.1 40.38,56.3 38.1,56.83 37.78,56.83 R68.2 | C24.1 40.38,76.62 38.1,77.15 37.78,77.15 R52.2 | 19.05,68.74 C11.1 17.46,68.74 v17.46,67.94 | 19.05,78.9 C10.1 | 19.05,58.58 C7.1 | 19.05,48.42 C8.1 17.46,48.42 v17.46,47.62 | 19.05,7.78 C2.1 17.46,7.78 v17.46,6.99 | 19.05,17.94 C3.1 | 19.05,28.1 C5.1 17.46,28.1 v17.46,27.3 | 19.05,38.26 C4.1 | 19.05,38.26
  Bottom 1.016: 12.38,15.18 C1.1 12.38,15.72 v12.38,35.56 v12.38,55.88 v12.38,76.2 v12.38,88.58 13.65,90.81 JP6.3 | v40.32,55.88 41.75,54.29 | v40.32,76.2 41.75,74.61 | v40.32,35.56 41.75,33.97 | v40.32,15.24 41.75,13.65 | v33.66,88.58 36.51,88.58 37.78,88.58 v40.32,88.58 | 12.38,15.18 v12.38,5.4 JP7.3 | 12.38,15.18 v12.38,15.24 | v33.66,5.4 36.51,5.4 37.78,5.4 v40.32,5.4 | JP7.1 v19.05,5.4 19.05,7.78 19.05,17.94 19.05,28.1 19.05,38.26 19.05,47.62 19.05,48.42 19.05,58.58 19.05,68.74 19.05,78.9 v19.05,88.58 JP6.1
  Bottom 1.422: JP7.1 C30.+ | C31.+ JP8.1 | JP5.1 C32.+ | JP6.1 C29.+
+5V1  (via drill 0.5)  (3 unrouted)
  Top 0.254: 73.66,-1.27 88.27,-1.27
  Top 0.406: IC36.16 65.41,73.98 65.3,74.4 | R153.2 69.53,37.15 | 69.53,36.83 R152.2 | 70.8,46.67 R155.2 70.8,46.99 R142.2 | 69.53,46.67 R156.2 R141.2 | 69.53,56.83 R144.2 69.53,57.15 | 70.8,66.99 R147.2 70.8,67.31 R134.2 | 69.53,66.99 R148.2 R133.2 | 70.8,56.83 R143.2 70.8,57.15 R146.2 | 70.8,77.15 R135.2 70.8,77.47 R138.2 | 69.53,77.15 R136.2 69.53,77.47 | 70.8,87.31 R139.2 70.8,88.58 | 70.8,36.51 R151.2 70.8,36.83 R154.2 | 69.53,26.99 R149.2 R164.2 | 70.79,26.66 70.8,26.99 R150.2 R163.2 | 70.8,16.19 R159.2 70.8,16.51 R162.2 | 69.53,16.19 R160.2 69.53,16.51 | 70.8,6.67 R158.2 70.8,5.4 | R246.2 85.09,10.16 84.99,10.06 | R247.2 84.77,12.7 84.99,12.48 | R248.2 85.09,15.24 84.99,15.14 | R249.2 85.09,17.78 84.99,17.68 | R250.2 85.09,20.32 84.99,20.22 | R251.2 85.09,22.86 84.99,22.76 | R252.2 84.77,25.4 84.99,25.18 | R229.2 85.09,27.94 84.99,27.84 | R230.2 85.09,30.48 84.99,30.38 | R231.2 85.09,33.02 84.99,32.92 | R232.2 85.09,35.56 84.99,35.46 | R233.2 85.09,38.1 84.99,38 | R234.2 85.09,40.64 84.99,40.54 | R235.2 85.09,43.18 84.99,43.08 | R236.2 85.09,45.72 84.99,45.62 | R197.2 85.09,48.26 84.99,48.16 | R198.2 85.09,50.8 84.99,50.7 | R199.2 85.09,53.34 84.99,53.24 | R200.2 85.09,55.88 84.99,55.78 | R201.2 85.09,58.42 84.99,58.32 | R202.2 85.09,60.96 84.99,60.86 | R203.2 85.09,63.5 84.99,63.4 | R204.2 85.09,66.04 84.99,65.94 | R181.2 85.09,68.58 84.99,68.48 | R182.2 85.09,71.12 84.99,71.02 | R183.2 85.09,73.66 84.99,73.56 | R184.2 85.09,76.2 84.99,76.1 | R185.2 85.09,78.74 84.99,78.64 | R186.2 85.09,81.28 84.99,81.18 | R187.2 85.09,83.82 84.99,83.72 | 85.09,86.36 84.99,86.26 | 69.53,88.58 R140.2 | 69.53,5.4 R157.2 | 89.85,78.9 89.85,78.42 | 66.99,36.04 C38.1 v66.99,35.56
  Top 0.406: 88.27,7.94 R263.2 | 89.85,68.26 v89.85,67.94 | 66.99,76.68 C44.1 v66.99,76.2 | 66.99,56.36 C41.1 v66.99,55.88 | 89.85,48.42 89.69,48.42 89.85,48.26 v89.85,47.62
  Top 0.61: IC26.3 v72.07,17.14 R162.2 | v72.07,6.99 IC25.3 | IC29.3 v72.07,37.47 R154.2 | IC28.3 v72.07,27.3 R150.2 | IC32.3 v72.07,57.78 R146.2 | IC31.3 v72.07,47.62 R142.2 | IC35.3 v72.07,78.11 R138.2 | IC34.3 v72.07,67.94 R134.2 | 65.56,75.25 IC36.16 | 69.53,36.83 70.8,36.83 | 69.53,36.83 R153.2 | 70.8,46.99 69.53,46.99 R141.2 | 69.53,57.15 70.8,57.15 | 69.53,57.15 R145.2 | 70.8,67.31 69.53,67.31 R133.2 | 69.53,77.47 70.8,77.47 | 69.53,77.47 R137.2 | 65.56,34.29 IC30.16 | IC27.16 65.56,13.97 | 65.56,54.61 IC33.16 | 70.79,26.66 69.53,26.67 R149.2 | 69.53,16.51 R161.2 | 69.53,16.51 70.8,16.51 | v66.99,35.56 69.53,36.83 | v66.99,15.24 69.53,16.51 | v66.99,55.88 69.53,57.15 | 66.99,76.52 69.53,77.47 | C49.1 v89.85,47.62
  Top 0.813: C44.1 66.99,76.52 | 84.99,10.06 R245.2 | 84.99,12.48 R246.2 | 84.99,15.14 R247.2 | 84.99,17.68 R248.2 | 84.99,20.22 R249.2 | 84.99,22.76 R250.2 | 84.99,25.18 R251.2 | 84.99,27.84 R252.2 | 84.99,30.38 R229.2 | 84.99,32.92 R230.2 | 84.99,35.46 R231.2 | 84.99,38 R232.2 | 84.99,40.54 R233.2 | 84.99,43.08 R234.2 | 84.99,45.62 R235.2 | 84.99,48.16 R236.2 | 84.99,50.7 R197.2 | 84.99,53.24 R198.2 | 84.99,55.78 R199.2 | 84.99,58.32 R200.2 | 84.99,60.86 R201.2 | 84.99,63.4 R202.2 | 84.99,65.94 R203.2 | 84.99,68.48 R204.2 | 84.99,71.02 R181.2 | 84.99,73.56 R182.2 | 84.99,76.1 R183.2 | 84.99,78.64 R184.2 | 84.99,81.18 R185.2 | 84.99,83.72 R186.2 | 84.99,86.26 R187.2 | 87.95,88.9 86.14,88.9 arc45 85.43,88.61 85.38,88.56 arc45 85.09,87.85 85.09,86.36 | 85.09,7.62 85.09,6.13 arc45 85.38,5.42 85.43,5.37 arc45 86.14,5.08 87.95,5.08 | 88.27,78.9 89.85,78.9 | 89.85,68.26 89.85,68.74 88.27,68.74 | 89.85,58.58 C50.1 | 89.85,58.58 v89.85,57.78 | 88.27,58.58 89.85,58.58 | 88.27,48.42 89.69,48.42 C49.1 89.85,48.42 | 88.27,38.26 89.85,38.26 | v89.85,27.3 89.85,28.42 C53.1 88.27,28.1 | 88.27,17.94 C52.1 89.85,17.94 | 88.27,7.78 C51.1 89.85,7.78
  Top 1.016: 66.99,76.52 65.56,75.25 | C38.1 66.99,35.88 65.56,34.29 | C33.1 66.99,15.56 65.56,13.97 | C41.1 66.99,56.2 65.56,54.61 | C50.1 89.85,58.1 | 89.85,68.26 C45.1 | 89.85,78.42 C46.1 | v89.85,37.47 89.85,37.78 C48.1 | C51.1 v89.85,6.99 | C52.1 89.85,17.46 | v88.27,88.58 88.27,78.9 88.27,68.74 88.27,58.58 88.27,48.42 88.27,38.26 88.27,28.1 88.27,17.94 88.27,7.94 88.27,7.78 v88.27,5.4 | v88.27,88.58 87.95,88.9 | 85.09,86.36 R188.2 | v88.27,5.4 87.95,5.08 | v73.66,88.58 70.8,88.58 69.53,88.58 v66.99,88.58 | v66.99,5.4 69.53,5.4 70.8,5.4 v73.66,5.4 | JP16.3 v94.93,5.4 v94.93,15.24 v94.93,35.56 v94.93,55.88 v94.93,76.2 v94.93,88.58 JP15.3 | JP16.1 v88.27,5.4 | v88.27,88.58 JP15.1
  Bottom 0.406: 96.52,13.34 96.62,13.44 | IC42.16 96.52,33.66 96.62,33.76 | IC45.16 96.36,54.29 96.74,54.08 | IC48.16 96.52,74.3 96.62,74.4 | R176.2 R177.2 92.39,16.83 92.38,16.5 | 91.12,16.19 R175.2 91.12,16.51 R178.2 | R166.2 91.12,26.67 R179.2 | 92.39,26.67 R180.2 | 91.12,36.51 R167.2 91.12,36.83 R170.2 | 91.12,46.67 R171.2 91.12,46.99 R222.2 | R221.2 92.39,46.99 R172.2 92.39,46.67 | R226.2 91.12,57.15 R223.2 | R214.2 91.12,67.31 R227.2 | R218.2 91.12,77.47 R215.2 | 92.39,87.31 92.38,87.33 92.38,88.25 92.39,88.58 | 91.12,6.67 R174.2 | 91.12,6.67 91.14,6.65 | v94.93,15.24 C55.1 | 94.93,36.2 C54.1 v94.93,35.56 | v94.93,55.88 C47.1 | v94.93,76.2 C56.1 | R224.2 92.39,57.15 R225.2 | R168.2 92.39,36.83 R169.2 | R180.2 92.39,26.35 | R180.2 R165.2 | 91.12,88.58 R219.2 | 91.12,5.4 91.12,6.67 | 92.39,5.4 R173.2 | R261.2 73.66,47.73 73.66,47.62 | 66.94,15.66 66.83,15.56 66.83,15.4 v66.99,15.24 | 66.99,15.18 66.94,15.66 | 66.94,15.66 66.99,15.72 | 66.99,15.72
  Bottom 0.61: 96.52,13.34 IC39.16 96.36,13.65 | 92.38,16.5 91.12,16.51 v89.85,17.14 IC38.3 | 91.12,26.67 92.39,26.67 | 92.39,36.83 91.12,36.83 v89.85,37.47 IC41.3 | 92.39,46.99 91.12,46.99 v89.85,47.62 IC43.3 | 92.39,57.15 91.12,57.15 v89.85,57.78 IC44.3 | 92.39,67.31 91.12,67.31 v89.85,67.94 IC46.3 | 92.39,77.47 91.12,77.47 v89.85,78.11 IC47.3 | R174.2 91.14,6.65 | 96.36,74.61 IC48.16 | 96.36,33.97 IC42.16 | v89.85,6.99 IC37.3 | 92.39,87.31 R220.2 | R216.2 92.39,77.47 | 92.39,77.47 R217.2 | 92.39,67.31 R228.2 | 92.39,67.31 R213.2 | R179.2 91.11,26.68 v89.85,27.3 IC40.3
  Bottom 0.813: C55.1 94.99,15.66 92.71,16.19 92.39,16.19 R176.2 | 94.93,36.2 92.55,36.51 92.39,36.51 R168.2 | C47.1 94.99,56.3 92.71,56.83 92.39,56.83 R224.2 | C56.1 94.99,76.62 92.71,77.15 92.39,77.15 R216.2 | 73.66,68.74 C43.1 72.07,68.74 v72.07,67.94 | 73.66,78.9 C42.1 | 73.66,58.58 C39.1 | 73.66,48.42 C40.1 72.07,48.42 v72.07,47.62 | 73.66,7.78 C34.1 72.07,7.78 v72.07,6.99 | 73.66,17.94 C35.1 | 73.66,28.1 C37.1 72.07,28.1 v72.07,27.3 | 73.66,38.26 C36.1 | 73.66,38.26
  Bottom 1.016: 66.99,15.18 C33.1 66.99,15.72 v66.99,35.56 v66.99,55.88 v66.99,76.2 v66.99,88.58 68.26,90.81 JP14.3 | v94.93,55.88 96.36,54.29 | v94.93,76.2 96.36,74.61 | v94.93,35.56 96.36,33.97 | v94.93,15.24 96.36,13.65 | v88.27,88.58 91.12,88.58 92.39,88.58 v94.93,88.58 | 66.99,15.18 v66.99,5.4 JP13.3 | 66.99,15.18 v66.99,15.24 | v88.27,5.4 91.12,5.4 92.39,5.4 v94.93,5.4 | JP13.1 v73.66,5.4 73.66,7.78 73.66,17.94 73.66,28.1 73.66,38.26 73.66,47.62 73.66,48.42 73.66,58.58 73.66,68.74 73.66,78.9 v73.66,88.58 JP14.1
  Bottom 1.422: JP13.1 C62.+ | C63.+ JP16.1 | JP15.1 C64.+ | JP14.1 C61.+
CLK_A  (via drill 0.3)
  Top 0.406: v9.53,60.96 IC10.2 | v9.53,40.64 IC7.2 | v9.53,20.32 IC21.2 | v9.53,81.28 IC13.2
  Bottom 0.813: JP6.5 v9.53,81.28 v9.53,60.96 v9.53,40.64 v9.53,20.32 JP7.5
CLK_A1  (via drill 0.3)
  Top 0.406: v64.14,60.96 IC33.2 | v64.14,40.64 IC30.2 | v64.14,20.32 IC27.2 | v64.14,81.28 IC36.2
  Bottom 0.813: JP14.5 v64.14,81.28 v64.14,60.96 v64.14,40.64 v64.14,20.32 JP13.5
CLK_B  (via drill 0.3)
  Top 0.813: JP5.5 v43.18,81.28 v43.18,60.96 v43.18,40.64 v43.18,20.32 JP8.5
  Bottom 0.61: v43.18,20.32 IC14.2 | v43.18,40.64 IC17.2 | v43.18,60.96 IC20.2 | 43.18,80.33 IC24.2 v43.18,81.28
CLK_B1  (via drill 0.3)
  Top 0.813: JP15.5 v97.79,81.28 v97.79,60.96 v97.79,40.64 v97.79,20.32 JP16.5
  Bottom 0.61: v97.79,20.32 IC39.2 | v97.79,40.64 IC42.2 | v97.79,60.96 IC45.2 | 97.79,80.33 IC48.2 v97.79,81.28
DA1
  Top 0.406: IC13.6 4.45,81.09 arc-45 5.03,82.5 7.35,84.82 arc-45 8.77,85.41 14.92,85.41 | 14.92,85.41 IC12.14 | 14.92,85.41 R16.1
DA2
  Top 0.406: IC36.6 59.05,81.09 arc-45 59.64,82.5 61.96,84.82 arc-45 63.38,85.41 69.53,85.41 | 69.53,85.41 IC35.14 | 69.53,85.41 R140.1
DA3
  Top 0.406: IC36.11 59.05,73.85 arc45 59.64,72.44 61.96,70.12 arc45 63.38,69.53 69.53,69.53 | 69.53,69.53 IC34.1 | 69.53,69.53 R133.1
DA4
  Top 0.406: IC33.6 59.05,60.77 arc-45 59.64,62.18 61.96,64.5 arc-45 63.38,65.09 69.53,65.09 69.53,64.93 | 69.53,64.93 IC32.14 | 69.53,64.93 R148.1
DA5
  Top 0.406: 69.53,49.21 IC31.1 | IC33.11 59.05,53.53 arc45 59.64,52.12 61.96,49.8 arc45 63.38,49.21 69.53,49.21 | 69.53,48.58 R141.1 69.53,49.21
DA6
  Top 0.406: IC30.6 59.05,40.5 arc-42 59.58,41.85 61.63,44.11 arc-48 63.12,44.77 69.53,44.77 | 69.53,44.77 IC29.14 | 69.53,44.77 R156.1
DA7
  Top 0.406: 69.53,28.89 IC28.1 | IC30.11 59.05,33.16 arc42 59.58,31.81 61.63,29.55 arc48 63.12,28.89 69.53,28.89 | 69.53,28.26 R149.1 69.53,28.89
DA8
  Top 0.406: IC13.11 4.45,73.85 arc45 5.03,72.44 7.35,70.12 arc45 8.77,69.53 14.92,69.53 | 14.92,69.53 IC11.1 | 14.92,69.53 R9.1
DA9
  Top 0.406: IC10.6 4.45,60.77 arc-45 5.03,62.18 7.35,64.5 arc-45 8.77,65.09 14.92,65.09 14.92,64.93 | 14.92,64.93 IC9.14 | 14.92,64.93 R24.1
DA10
  Top 0.406: IC27.6 59.05,20.13 arc-45 59.64,21.54 61.96,23.86 arc-45 63.38,24.45 69.53,24.45 | 69.53,24.45 IC26.14 | 69.53,24.45 R164.1
DA11
  Top 0.406: IC27.11 59.05,12.89 arc45 59.64,11.48 61.96,9.16 arc45 63.38,8.57 69.53,8.57 | 69.53,8.57 IC25.1 | 69.53,7.94 R157.1 69.53,8.57
DA16
  Top 0.406: 14.92,49.21 IC8.1 | IC10.11 4.45,53.53 arc45 5.03,52.12 7.35,49.8 arc45 8.77,49.21 14.92,49.21 | 14.92,48.58 R17.1 14.92,49.21
DA17
  Top 0.406: IC7.6 4.45,40.5 arc-42 4.96,41.85 7.03,44.11 arc-48 8.51,44.77 14.92,44.77 | 14.92,44.77 IC6.14 | 14.92,44.77 R32.1
DA24
  Top 0.406: 14.92,28.89 IC5.1 | IC7.11 4.45,33.16 arc42 4.96,31.81 7.03,29.55 arc48 8.51,28.89 14.92,28.89 | 14.92,28.26 R25.1 14.92,28.89
DA25
  Top 0.406: IC21.6 4.45,20.13 arc-45 5.03,21.54 7.35,23.86 arc-45 8.77,24.45 14.92,24.45 | 14.92,24.45 IC2.14 | 14.92,24.45 R40.1
DA32
  Top 0.406: IC21.11 4.45,12.89 arc45 5.03,11.48 7.35,9.16 arc45 8.77,8.57 14.92,8.57 | 14.92,8.57 IC1.1 | 14.92,7.94 R33.1 14.92,8.57
DB1
  Bottom 0.406: IC24.6 48.26,81.09 arc45 47.67,82.5 45.35,84.82 arc45 43.94,85.41 37.78,85.41
  Bottom 0.61: IC23.14 37.78,85.41 R56.1
DB2
  Bottom 0.406: IC48.6 102.87,81.09 arc45 102.28,82.5 99.96,84.82 arc45 98.55,85.41 92.39,85.41
  Bottom 0.61: IC47.14 92.39,85.41 R220.1
DB3
  Bottom 0.406: 92.39,69.53 98.55,69.53 arc45 99.96,70.12 102.28,72.44 arc45 102.87,73.85 IC48.11
  Bottom 0.61: 92.39,68.9 R213.1 92.39,69.53 IC46.1
DB4
  Bottom 0.406: IC45.6 102.87,60.77 arc45 102.28,62.18 99.96,64.5 arc45 98.55,65.09 92.39,65.09
  Bottom 0.61: IC44.14 92.39,65.09 R228.1
DB5
  Bottom 0.406: 92.39,49.21 98.55,49.21 arc45 99.96,49.8 102.28,52.12 arc45 102.87,53.53 IC45.11 | 92.39,48.58 R221.1 92.39,49.21 | 92.39,49.21 IC43.1
DB6
  Bottom 0.406: IC42.6 102.87,40.45 arc45 102.28,41.86 99.96,44.18 arc45 98.55,44.77 92.39,44.77 | R172.1 92.39,44.77 | 92.39,44.77 IC41.14
DB7
  Bottom 0.406: 92.39,28.89 98.55,28.89 arc45 99.96,29.48 102.28,31.8 arc45 102.87,33.21 IC42.11 | 92.39,28.26 R165.1 92.39,28.89 | 92.39,28.89 IC40.1
DB8
  Bottom 0.406: 37.78,69.53 43.94,69.53 arc45 45.35,70.12 47.67,72.44 arc45 48.26,73.85 IC24.11
  Bottom 0.61: 37.78,68.9 R49.1 37.78,69.53 IC22.1
DB9
  Bottom 0.406: IC20.6 48.26,60.77 arc45 47.67,62.18 45.35,64.5 arc45 43.94,65.09 37.78,65.09
  Bottom 0.61: IC19.14 37.78,65.09 R72.1
DB10
  Bottom 0.406: 92.39,24.45 98.55,24.45 arc-45 99.96,23.86 102.28,21.54 arc-45 102.87,20.13 IC39.6 | 92.39,24.45 IC38.14 | R180.1 92.39,24.45
DB11
  Bottom 0.406: 92.39,8.57 98.55,8.57 arc45 99.96,9.16 102.28,11.48 arc45 102.87,12.89 IC39.11 | 92.39,7.94 R173.1 92.39,8.57 | 92.39,8.57 IC37.1
DB16
  Bottom 0.406: 37.78,49.21 43.94,49.21 arc45 45.35,49.8 47.67,52.12 arc45 48.26,53.53 IC20.11 | 37.78,48.58 R65.1 37.78,49.21 | 37.78,49.21 IC18.1
DB17
  Bottom 0.406: IC17.6 48.26,40.45 arc45 47.67,41.86 45.35,44.18 arc45 43.94,44.77 37.78,44.77 | R8.1 37.78,44.77 | 37.78,44.77 IC16.14
DB24
  Bottom 0.406: 37.78,28.89 43.94,28.89 arc45 45.35,29.48 47.67,31.8 arc45 48.26,33.21 IC17.11 | 37.78,28.26 R1.1 37.78,28.89 | 37.78,28.89 IC15.1
DB25
  Bottom 0.406: 37.78,24.45 43.94,24.45 arc-45 45.35,23.86 47.67,21.54 arc-45 48.26,20.13 IC14.6 | 37.78,24.45 IC4.14 | R48.1 37.78,24.45
DB32
  Bottom 0.406: 37.78,8.57 43.94,8.57 arc45 45.35,9.16 47.67,11.48 arc45 48.26,12.89 IC14.11 | 37.78,7.94 R41.1 37.78,8.57 | 37.78,8.57 IC3.1
GND  (via drill 0.5)
  other vias: 13.65,7.3 8.26,27.62 13.65,47.94 13.65,58.1 13.65,68.26 13.65,78.42 1.59,82.55 1.59,62.23 1.59,41.91 13.65,17.46 17.46,86.68 17.46,76.52 17.46,66.36 17.46,56.2 17.46,46.04 17.46,35.88 17.46,25.72 17.46,15.56 1.59,21.59 8.26,47.94 8.26,68.26 13.65,37.78 13.65,25.72 13.65,27.62 8.26,25.72 13.65,86.68 6.35,85.72 13.65,66.36 8.26,66.36 13.65,46.04 8.26,46.04 35.24,76.52 35.24,86.68 35.24,66.36 35.24,56.2 35.24,46.04 35.24,35.88 35.24,25.72 35.24,15.56 39.05,17.46 39.05,37.78 39.05,58.1 39.05,78.42 39.05,86.68 51.12,82.55 51.12,62.23 51.12,41.91 51.12,21.59 1.59,29.21 1.59,24.13 1.59,44.45 1.59,49.53 1.59,69.85 1.59,65.09 39.05,7.3 39.05,27.62 39.05,25.72 39.05,46.04 39.05,47.94 39.05,66.36 39.05,68.26 44.45,68.26 44.45,66.36 47.31,9.21 45.4,5.4 44.45,27.62 44.45,25.72 44.45,47.94 44.45,46.04 45.72,88.58 46.35,85.72 5.4,9.21 7.3,5.08 2.54,9.21 3.49,6.03 48.9,5.4 50.48,9.84 51.12,24.13 51.12,29.21 51.12,49.53 51.12,44.45 51.12,64.77 51.12,69.85 49.21,88.58 49.53,85.72 6.99,88.58 3.49,88.58 3.17,85.72
  pour Top (isolate 0.406): 0.32,0.32 52.39,0.32 52.39,99.69 0.32,99.69
  pour Bottom (isolate 0.406): 0.32,0.32 52.39,0.32 52.39,99.69 0.32,99.69
GND1  (via drill 0.5)
  other vias: 68.26,7.3 62.86,27.62 68.26,47.94 68.26,58.1 68.26,68.26 68.26,78.42 56.2,82.55 56.2,62.23 56.2,41.91 68.26,17.46 72.07,86.68 72.07,76.52 72.07,66.36 72.07,56.2 72.07,46.04 72.07,35.88 72.07,25.72 72.07,15.56 56.2,21.59 62.86,47.94 62.86,68.26 68.26,37.78 68.26,25.72 68.26,27.62 62.86,25.72 68.26,86.68 60.96,85.73 68.26,66.36 62.86,66.36 68.26,46.04 62.86,46.04 89.85,76.52 89.85,86.68 89.85,66.36 89.85,56.2 89.85,46.04 89.85,35.88 89.85,25.72 89.85,15.56 93.66,17.46 93.66,37.78 93.66,58.1 93.66,78.42 93.66,86.68 105.73,82.55 105.73,62.23 105.73,41.91 105.73,21.59 56.2,29.21 56.2,24.13 56.2,44.45 56.2,49.53 56.2,69.85 56.2,65.09 93.66,7.3 93.66,27.62 93.66,25.72 93.66,46.04 93.66,47.94 93.66,66.36 93.66,68.26 99.06,68.26 99.06,66.36 101.92,9.21 100.01,5.4 99.06,27.62 99.06,25.72 99.06,47.94 99.06,46.04 100.33,88.58 100.96,85.73 60.01,9.21 61.91,5.08 57.15,9.21 58.1,6.03 103.5,5.4 105.09,9.84 105.73,24.13 105.73,29.21 105.73,49.53 105.73,44.45 105.73,64.77 105.73,69.85 103.82,88.58 104.14,85.73 61.59,88.58 58.1,88.58 57.78,85.73
  pour Top (isolate 0.406): 54.93,0.32 107,0.32 107,99.7 54.93,99.7
  pour Bottom (isolate 0.406): 54.93,0.32 107,0.32 107,99.7 54.93,99.7
KI1